# Altium PCB Aux_Lights_Daughter_REV3.PcbDoc
Units mil, origin at the board's own origin, x right, y up, seen from the top; angles counter-clockwise.
Board outline 3300 x 3200 mil, 2 copper layers (Top Layer, Bottom Layer); 49 components, 38 nets, 226 pads, 24 vias.
Unrouted connection lines stored in the file: 51.
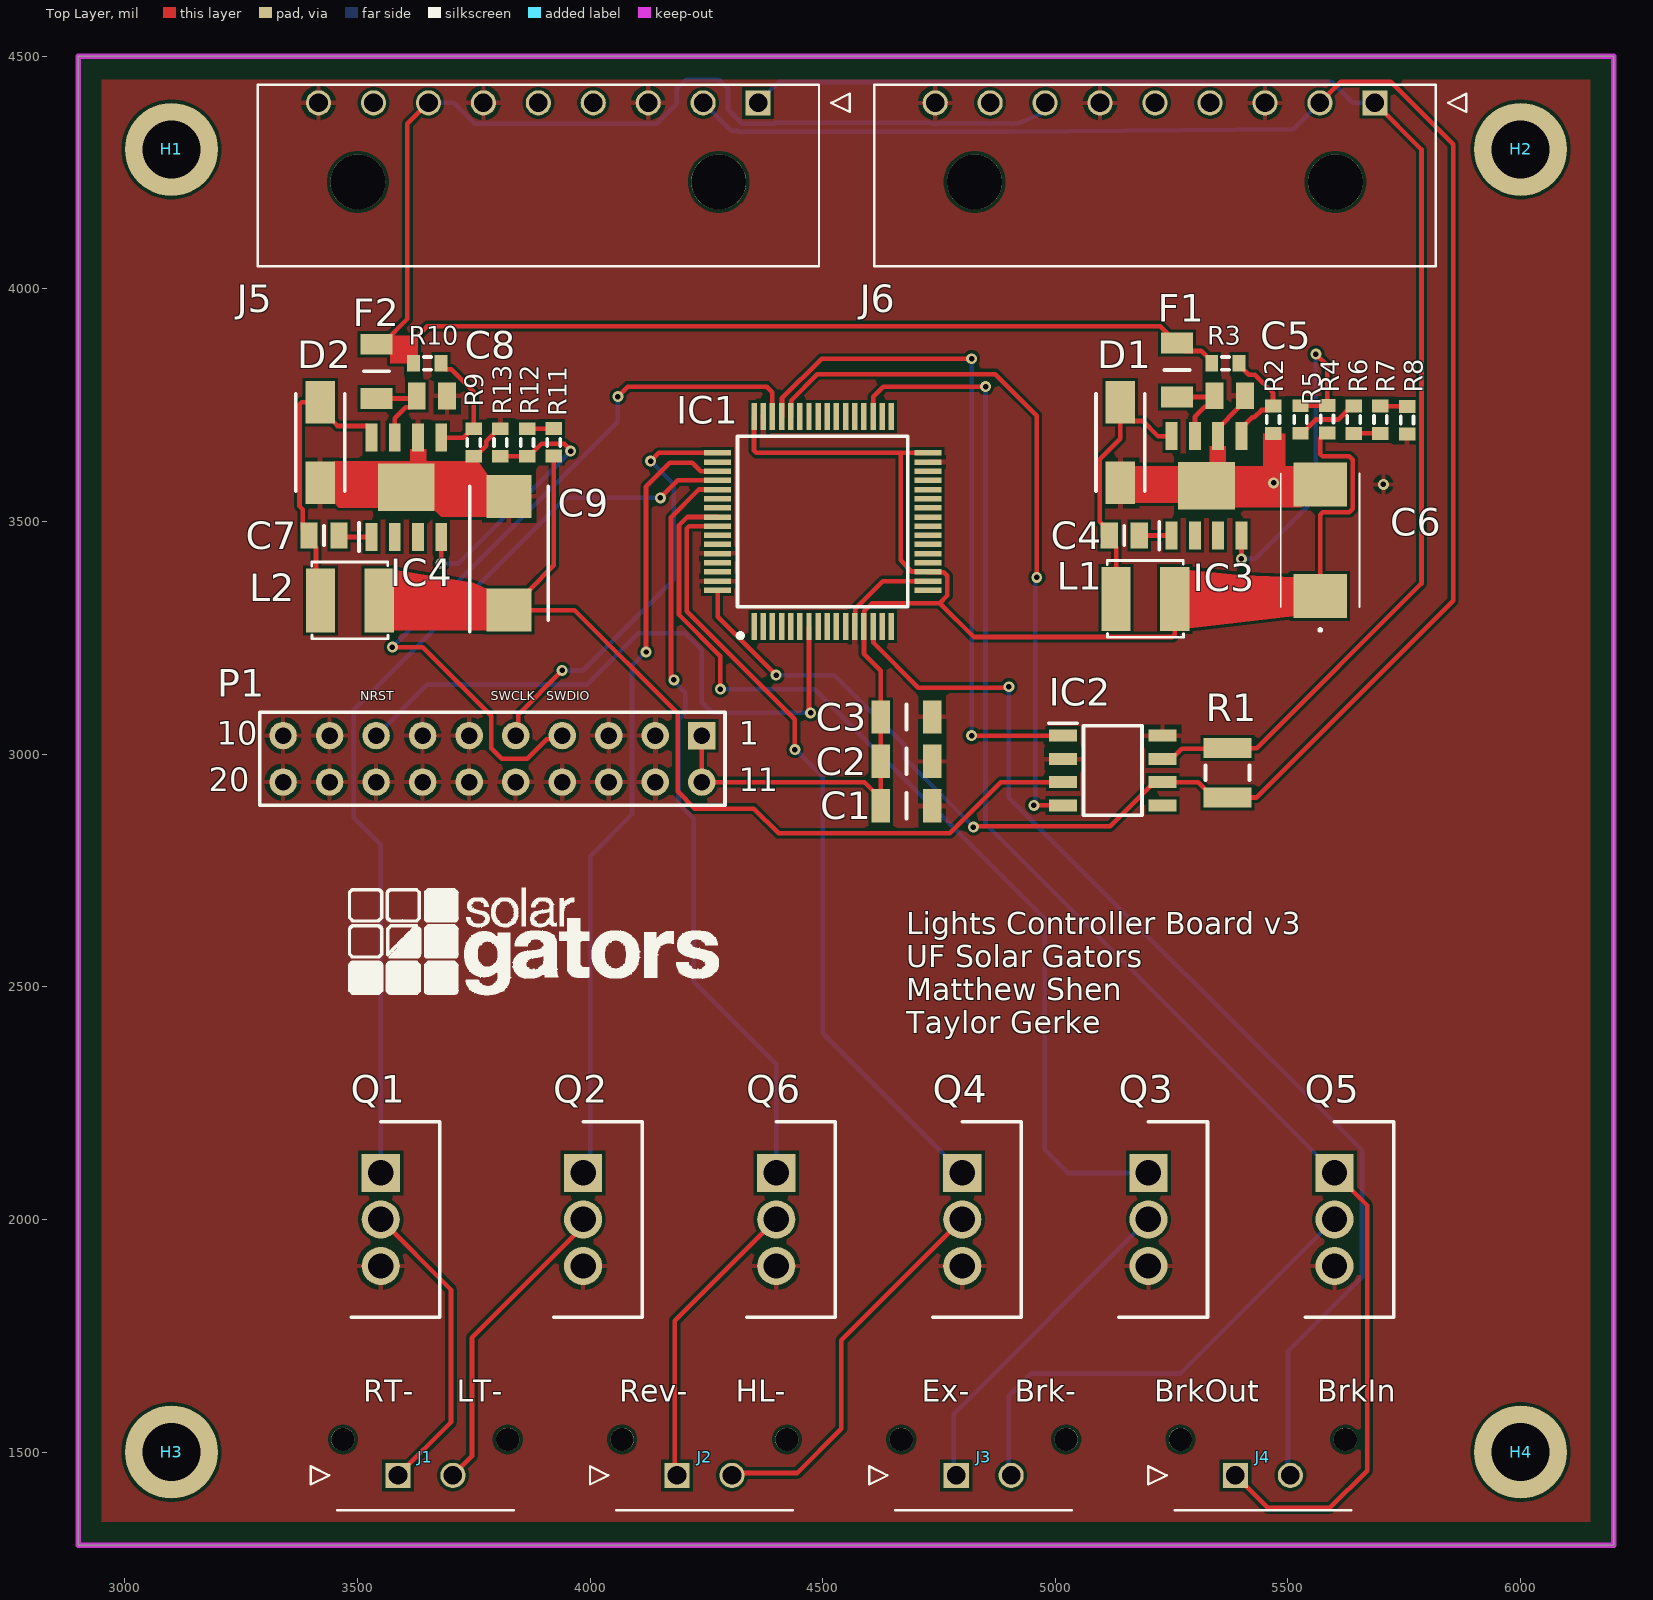
[diagram p0: Top Layer view]
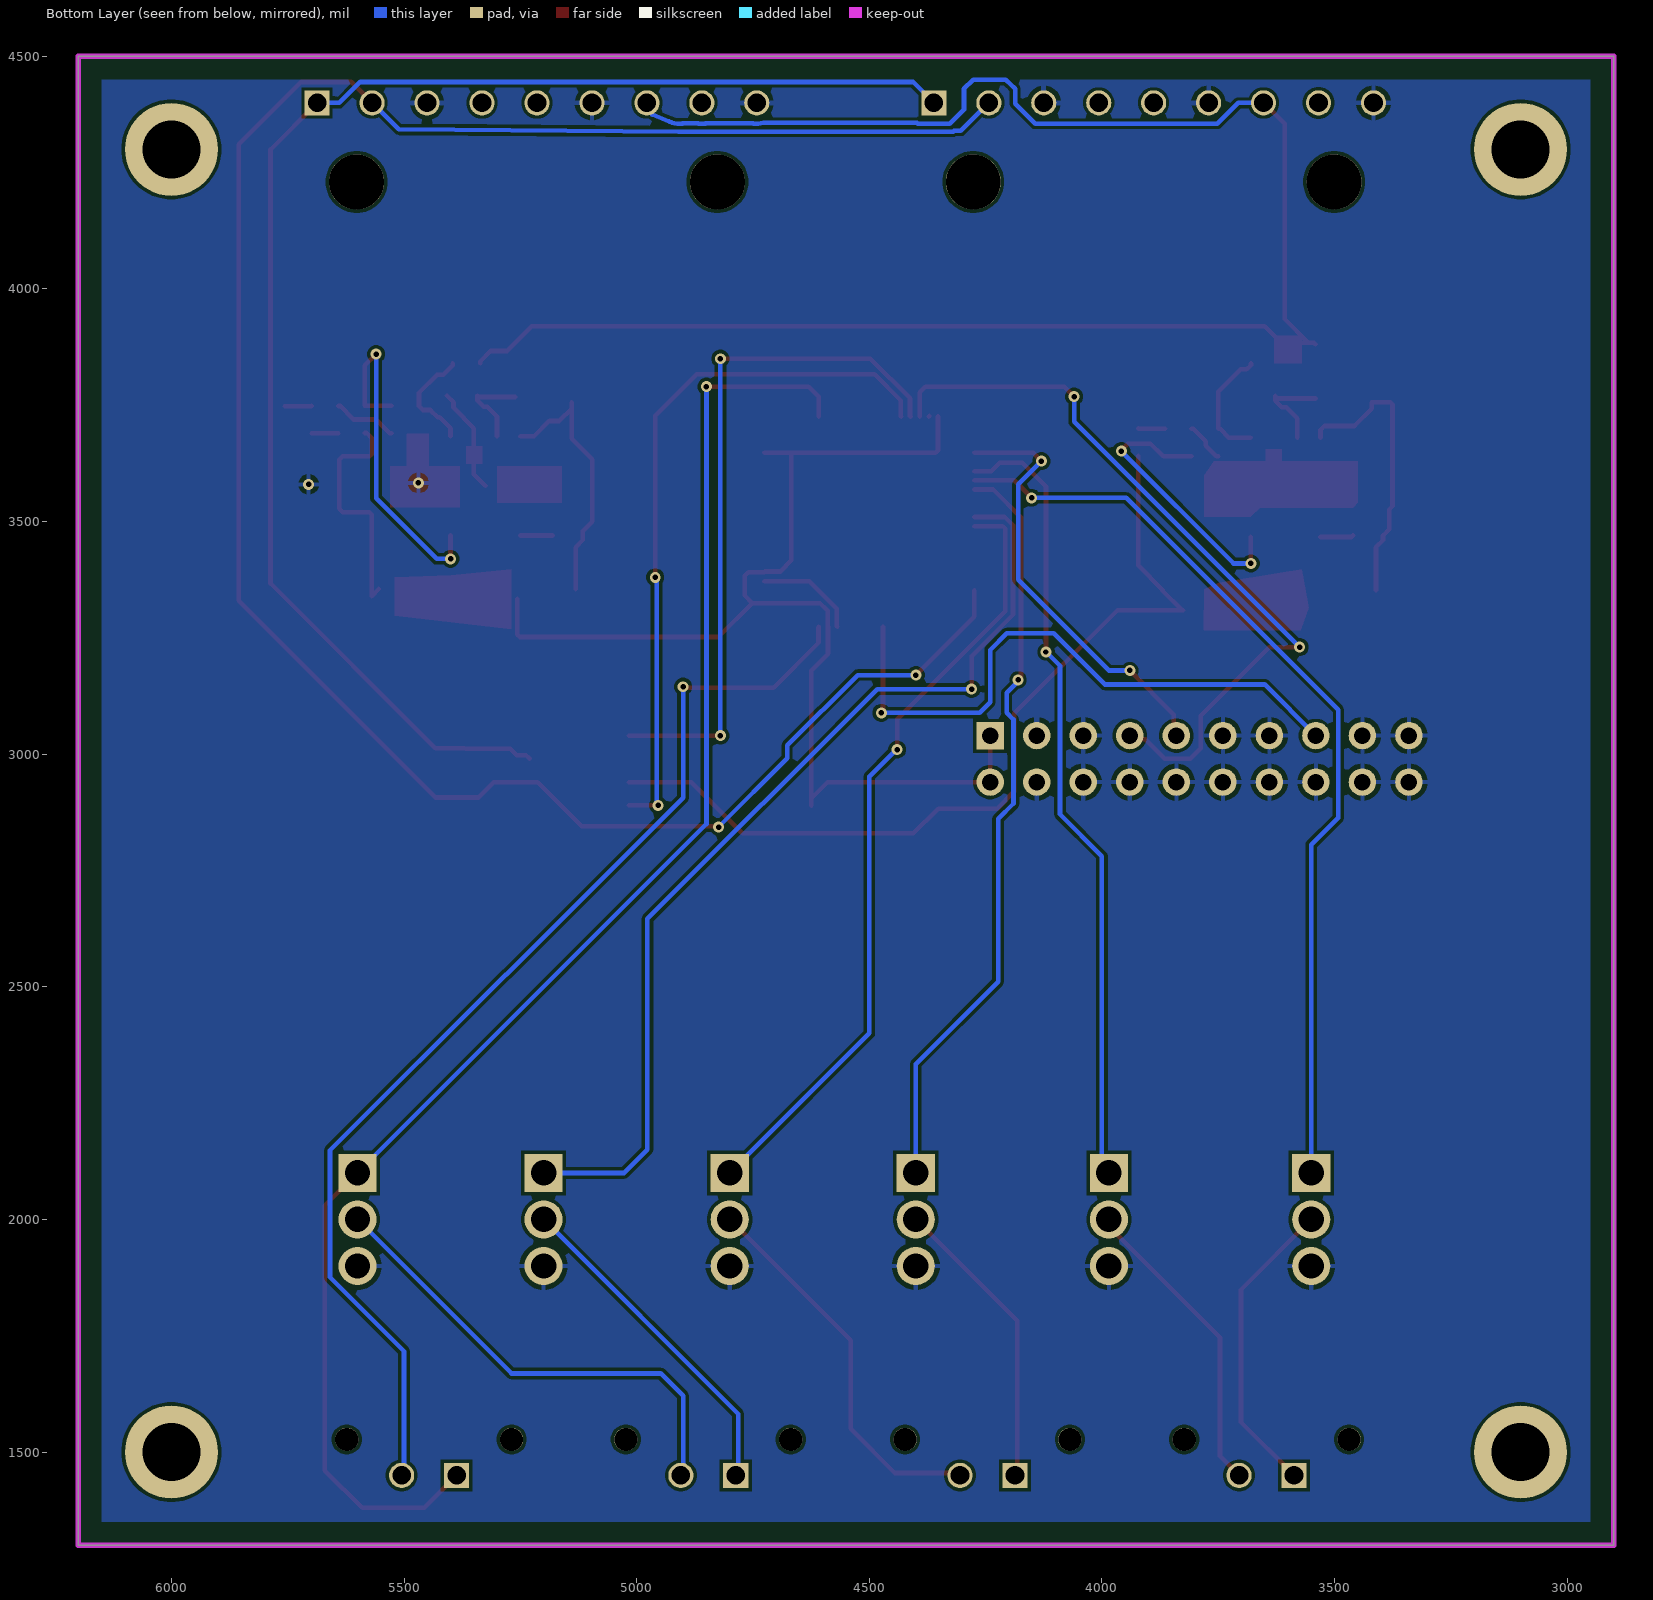
[diagram p1: Bottom Layer view, seen from below]
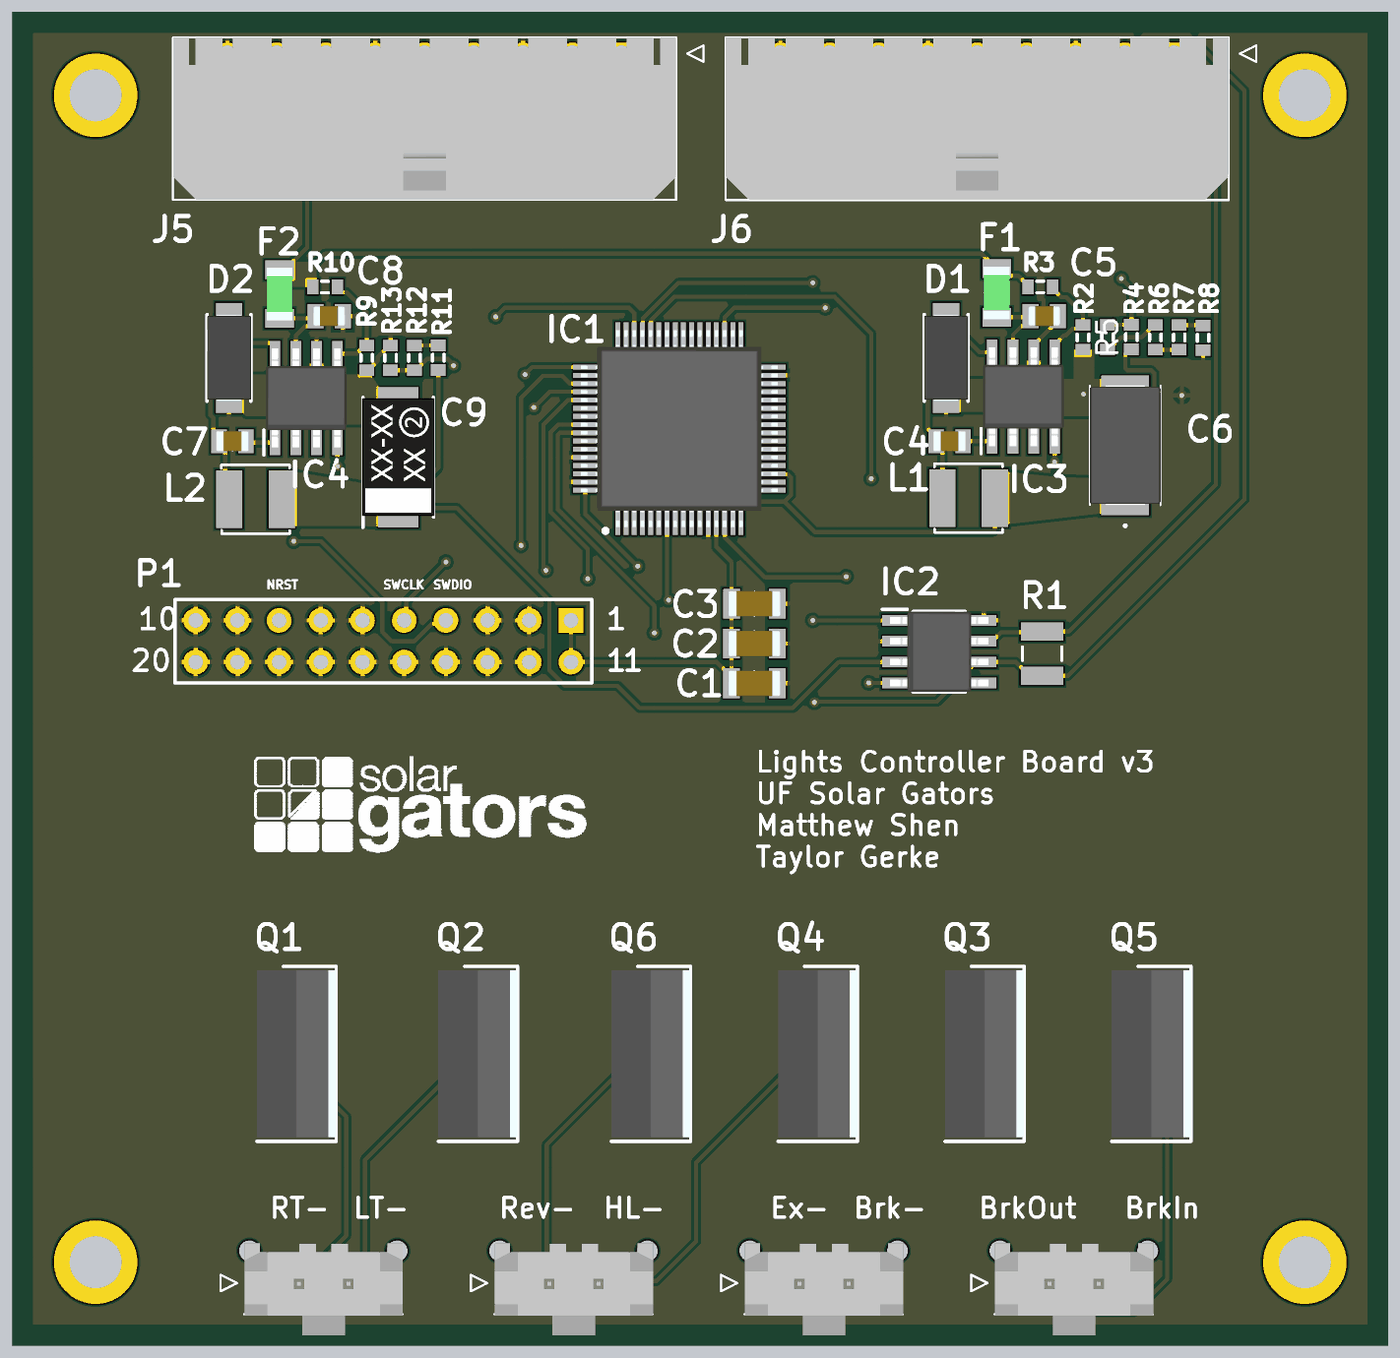
[diagram p2: 3D render of the assembled board from above, using the file's embedded part models]

## Layer stack, top to bottom
Top Solder: solder mask 0.4, Solder Resist, Dk 3.5
Top Layer: signal copper 1.4
Dielectric 1: dielectric 12.6, FR-4, Dk 4.8
Bottom Layer: signal copper 1.4
Bottom Solder: solder mask 0.4, Solder Resist, Dk 3.5

## Board outline
2900,1300 6200,1300 6200,4500 2900,4500

## Design rules (kind name [scope] priority, off if disabled: settings)
Clearance "Same Net Clearance" [All] p1: gap=7 ignorepadtopadclearanceinfootprint=FALSE except(0: Arc-Hole Track-Hole SMDPad-Hole THPad-Hole Via-Hole Fill-Hole Poly-Hole Region-Hole Text-Hole; 5: SMDPad-SMDPad; 7.87: Arc-SMDPad Track-SMDPad; 10: Arc-THPad Arc-Via Track-THPad Track-Via Via-Via; 19.68: THPad-THPad)
Clearance "Different Net Clearance" [All] p2: gap=7 ignorepadtopadclearanceinfootprint=FALSE except(0: Arc-Hole Track-Hole SMDPad-Hole THPad-Hole Via-Hole Fill-Hole Poly-Hole Region-Hole Text-Hole; 5: SMDPad-SMDPad; 7.87: Arc-SMDPad Track-SMDPad; 10: Arc-Via Track-Via Via-Via; 12.99: Arc-THPad Track-THPad; 15: THPad-THPad)
HoleSize [All] p1: absolutevalues=TRUE maxlimit=248.03 minlimit=7.87 maxpercent=80.000 minpercent=20.000
HoleToHoleClearance [All] p1: gap=19.68 allowstackedmicrovias=TRUE
MinimumSolderMaskSliver [All] p1: minsoldermaskwidth=8
PolygonConnect [All] p1: connectstyle=Relief reliefconductorwidth=10 reliefentries=4 polygonreliefangle="90 Angle" airgapwidth=10
RoutingVias [All] p1: holewidth=7.87 width=15.75 viastyle="Through Hole" minholewidth=7.87 minwidth=15.75 maxholewidth=28 maxwidth=50
SilkToSolderMaskClearance [IsPad] p1: minsilkscreentomaskgap=1.97 clearancetoexposedcopper=TRUE
SolderMaskExpansion [All] p1: expansion=4 istentingtop=FALSE
Width [All] p1: maxlimit=10 minlimit=5 preferedwidth=10
26 further rules are at their usual default settings.

## Classes and differential pairs
component class Aux_Lights_Power_Conversion: C4 C5 C6 C7 C8 C9 D1 D2 F1 F2 IC3 IC4 L1 L2 R2 R3 R4 R5 R6 R7 R8 R9 R10 R11 R12 R13
component class Aux_Lights_Daughter_REV3: C1 C2 C3 H1 H2 H3 H4 IC1 IC2 J1 J2 J3 J4 J5 J6 P1 Q1 Q2 Q3 Q4 Q5 Q6 R1

## Components (designator, comment, footprint, x,y, rotation, side; value= is the part's Value field where it differs from the comment)
C1 "C1206C104K5RAC7867" CAPC3216X110N 4680,2889.11 r0 top
C2 "C1206C104K5RAC7867" CAPC3216X110N 4680,2984.56 r0 top
C3 "C1206C104K5RAC7867" CAPC3216X110N 4680.12,3080 r0 top
C4 "CL21B103KBANNNC" CAPC2012X65N 5148.06,3470 r0 top value=10nF
C5 "CL21A106KAYNNNE" CAPC2012X145N 5374.97,3770.44 r0 top value="10 uF"
C6 "4TPE330M" POSCAP_D12_D15_D15E_D2E_D2_D3L_D4 5569.26,3460 r90 top value=330uF
C7 "CL21B103KBANNNC" CAPC2012X65N 3428.06,3470 r0 top value=10nF
C8 "CL21A106KAYNNNE" CAPC2012X145N 3660,3770 r0 top value="10 uF"
C9 "293D227X9010D2TE3" CAPPM7343X310N 3825.64,3431.64 r90 top value=220uF
D1 "SS14" DIONM5327X242N 5139.79,3670 r270 top
D2 "SS14" DIONM5327X242N 3419.79,3670 r270 top
F1 "0437.250WR" FUSC3216X86N 5261.02,3825.95 r90 top value=250mA
F2 "0437.250WR" FUSC3216X86N 3541.02,3822.87 r90 top value=250mA
H1 "Hole 125mil" Hole 3100,4300 r0 top
H2 "Hole 125mil" Hole 6000,4300 r0 top
H3 "Hole 125mil" Hole 3100,1500 r0 top
H4 "Hole 125mil" Hole 6000,1500 r0 top
IC1 "STM32F072RBT6" QFP50P1200X1200X160-64N 4500,3500 r90 top
IC2 "SN65HVDA1040BQDRQ1" SOIC127P600X175-8N 5123.27,2965 r0 top
IC3 "TPS5430MDDAREP" SOIC127P600X170-9N 5325,3576.77 r90 top
IC4 "TPS5430MDDAREP" SOIC127P600X170-9N 3605,3573.69 r90 top
J1 "43650-0215" 43650-02YY_15,16,17 3586.89,1450 r180 top
J2 "43650-0215" 43650-02YY_15,16,17 4186.89,1450 r180 top
J3 "43650-0215" 43650-02YY_15,16,17 4786.89,1450 r180 top
J4 "43650-0215" 43650-02YY_15,16,17 5386.89,1450 r180 top
J5 "43650-0900" 43650-09YY_R 4361.14,4400.08 r0 top
J6 "43650-0900" 43650-09YY_R 5686.64,4400 r0 top
L1 "SWPA4030S100MT" SWPA4030S100MT 5199,3338.19 r0 top value=22uH
L2 "SWPA4030S100MT" SWPA4030S100MT 3489,3335.11 r0 top value=22uH
P1 "Header 10X2A" HDR2X10_CEN 4240,3040 r180 top
Q1 "FQP13N06L" TO254P483X1016X2261-3P 3550,2100 r270 top
Q2 "FQP13N06L" TO254P483X1016X2261-3P 3985,2100 r270 top
Q3 "FQP13N06L" TO254P483X1016X2261-3P 5200,2100 r270 top
Q4 "FQP13N06L" TO254P483X1016X2261-3P 4800,2100 r270 top
Q5 "FQP13N06L" TO254P483X1016X2261-3P 5600,2100 r270 top
Q6 "FQP13N06L" TO254P483X1016X2261-3P 4400,2100 r270 top
R1 "SG73P2ETTD1200F" 14-1210 5370,2960 r90 top value=1K
R2 "0603WAF6802T5E" J1-0603 5467.88,3719.03 r90 top value=1K
R3 "0603WAF100KT5E" J1-0603 5365.52,3840.1 r180 top value=1K
R4 "0603WAF1302T5E" J1-0603 5584.16,3720 r90 top value=13K
R5 "0603WAF2201T5E" J1-0603 5526.9,3719.53 r270 top value=2.2K
R6 "0603WAF2201T5E" J1-0603 5641.41,3719.03 r270 top value=2.2K
R7 "0603WAF2201T5E" J1-0603 5698.67,3719.03 r90 top value=2.2K
R8 "0603WAF1001T5E" J1-0603 5755.92,3718.05 r270 top value=1K
R9 "0603WAF6802T5E" J1-0603 3750,3670 r90 top value=1K
R10 "0603WAF100KT5E" J1-0603 3650,3840 r180 top value=1K
R11 "0603WAF1002T5E" J1-0603 3921.76,3670.47 r90 top value=10K
R12 "0603WAF2000T5E" J1-0603 3864.51,3670 r270 top value=0.2k
R13 "0603WAF3301T5E" J1-0603 3807.26,3670 r90 top value=3.3K

## Footprints (in the part's own frame and the unit in brackets; to place one, negate y for a bottom-side part, rotate by r counter-clockwise, add the part's x,y. Pads: shape width x height; smd on the part's side, far side on the other; paste and mask are expansions set on the pad)
14-1210 [mm] "Chip Resistor, Body 3.2x2.5mm, IPC High Density"
  rect 1.1x2.6 smd: 1(-1.35,0) 2(1.35,0)
  silkscreen extent -0.4,-1.2 0.4,1.2, body extent -1.68,-1.32 1.68,1.32, height 0.9
43650-02YY_15,16,17 [mm]
  rect 1.37x1.37 hole 1.02: 1(0,0)
  round 1.37 hole 1.02: 2(-3,0)
  round 1.27 hole 1.27 unplated: 3(3,-1.96) 4(-6,-1.96)
  silkscreen extent -6.32,-0.5 4.75,1.9, body extent -6.35,-2.42 3.3,3.18, height 9.81
43650-09YY_R [mm]
  rect 1.37x1.37 hole 1.02: 1(0,0)
  round 1.37 hole 1.02: 2(-3,0) 3(-6,0) 4(-9,0) 5(-12,0) 6(-15,0) 7(-18,0) 8(-21,0) 9(-24,0)
  round 3 hole 3 unplated: 10(-2.15,-4.32) 11(-21.85,-4.32)
  silkscreen extent -27.33,-8.92 5,0.98, body extent -27.31,-8.9 3.32,1, height 5.54
CAPC2012X65N [mm]
  rect 0.94x1.43 smd: 1(-0.82,0) 2(0.82,0)
  silkscreen extent 0,-0.53 0,0.53, body extent -1,-0.63 1,0.63, height 0.65
CAPC2012X145N [mm]
  rect 0.97x1.47 smd: 1(-0.83,0) 2(0.83,0)
  body extent -1,-0.63 1,0.63, height 1.45
CAPC3216X110N [mm]
  rect 1.02x1.82 smd: 1(-1.4,0) 2(1.4,0)
  silkscreen extent 0,-0.7 0,0.7, body extent -1.6,-0.8 1.6,0.8, height 1.1
CAPPM7343X310N [mm]
  rect 2.35x2.45 smd: 1(-3.1,0) 2(3.1,0)
  silkscreen extent -4.28,-2.15 3.65,2.15, body extent -3.59,-2.21 3.6,2.21, height 2.92
DIONM5327X242N [mm]
  rect 2.3x1.6 smd: 1(-2.2,0) 2(2.2,0)
  silkscreen extent -2.65,-1.33 2.65,1.34, body extent -2.65,-1.34 2.65,1.34, height 2.42
FUSC3216X86N [mm]
  rect 1.14x1.75 smd: 1(-1.48,0) 2(1.48,0)
  silkscreen extent 0,-0.69 0,0.69, body extent -1.6,-0.79 1.6,0.79, height 0.86
HDR2X10_CEN [mm] "Connector; Header; 10x2 Position"
  rect 1.5x1.5 hole 0.9: 1(0,0)
  round 1.5 hole 0.9: 2(2.54,0) 3(5.08,0) 4(7.62,0) 5(10.16,0) 6(12.7,0) 7(15.24,0) 8(17.78,0) 9(20.32,0) 10(22.86,0) 11(0,2.54) 12(2.54,2.54) 13(5.08,2.54) 14(7.62,2.54) 15(10.16,2.54) 16(12.7,2.54) 17(15.24,2.54) 18(17.78,2.54) 19(20.32,2.54) 20(22.86,2.54)
  silkscreen extent -1.27,-1.27 24.13,3.81
Hole [mil]
  round 200 hole 125: 2(0,0)
J1-0603 [mm] "Chip Resistor, Body 1.6x0.8mm, IPC High Density"
  rect 0.7x0.9 smd: 1(-0.75,0) 2(0.75,0)
  silkscreen extent -0.2,-0.35 0.2,0.35, body extent -0.85,-0.48 0.85,0.48, height 0.9
POSCAP_D12_D15_D15E_D2E_D2_D3L_D4 [mm]
  rect 2.4x2.9 smd: 1(-3.05,0) 2(3.05,0)
  silkscreen extent -4.95,-2.15 3.65,2.15, body extent 0,0 0,0, height 1.02
QFP50P1200X1200X160-64N [mm]
  rect 1.475x0.3 smd: 1(-5.738,3.75) 2(-5.738,3.25) 3(-5.738,2.75) 4(-5.738,2.25) 5(-5.738,1.75) 6(-5.738,1.25) 7(-5.738,0.75) 8(-5.738,0.25) 9(-5.738,-0.25) 10(-5.738,-0.75) 11(-5.738,-1.25) 12(-5.738,-1.75) 13(-5.738,-2.25) 14(-5.738,-2.75) 15(-5.738,-3.25) 16(-5.738,-3.75) 33(5.738,-3.75) 34(5.738,-3.25) 35(5.738,-2.75) 36(5.738,-2.25) 37(5.738,-1.75) 38(5.738,-1.25) 39(5.738,-0.75) 40(5.738,-0.25) 41(5.738,0.25) 42(5.738,0.75) 43(5.738,1.25) 44(5.738,1.75) 45(5.738,2.25) 46(5.738,2.75) 47(5.738,3.25) 48(5.738,3.75)
  rect 0.3x1.475 smd: 17(-3.75,-5.738) 18(-3.25,-5.738) 19(-2.75,-5.738) 20(-2.25,-5.738) 21(-1.75,-5.738) 22(-1.25,-5.738) 23(-0.75,-5.738) 24(-0.25,-5.738) 25(0.25,-5.738) 26(0.75,-5.738) 27(1.25,-5.738) 28(1.75,-5.738) 29(2.25,-5.738) 30(2.75,-5.738) 31(3.25,-5.738) 32(3.75,-5.738) 49(3.75,5.738) 50(3.25,5.738) 51(2.75,5.738) 52(2.25,5.738) 53(1.75,5.738) 54(1.25,5.738) 55(0.75,5.738) 56(0.25,5.738) 57(-0.25,5.738) 58(-0.75,5.738) 59(-1.25,5.738) 60(-1.75,5.738) 61(-2.25,5.738) 62(-2.75,5.738) 63(-3.25,5.738) 64(-3.75,5.738)
  silkscreen extent -6.35,-4.65 4.65,4.65, body extent -6,-6 6,6, height 1.6
SOIC127P600X170-9N [mm]
  rect 1.525x0.65 smd: 1(-2.712,1.905) 2(-2.712,0.635) 3(-2.712,-0.635) 4(-2.712,-1.905) 5(2.712,-1.905) 6(2.712,-0.635) 7(2.712,0.635) 8(2.712,1.905)
  rect 2.6x3.1 smd: 9(0,0)
  silkscreen extent -3.47,2.58 -1.95,2.58, body extent -3.01,-2.45 3.01,2.45, height 1.57
SOIC127P600X175-8N [mm]
  rect 1.528x0.65 smd: 1(-2.711,1.905) 2(-2.711,0.635) 3(-2.711,-0.635) 4(-2.711,-1.905) 5(2.711,-1.905) 6(2.711,-0.635) 7(2.711,0.635) 8(2.711,1.905)
  silkscreen extent -3.47,-2.45 1.6,2.58, body extent -3.01,-2.45 3.01,2.45, height 1.63
SWPA4030S100MT [mm]
  rect 1.6x3.5 smd: 1(-1.74,-0.115) 2(1.46,-0.115)
  silkscreen extent -2.22,-2.21 1.94,1.98
TO254P483X1016X2261-3P [mm]
  rect 2.085x2.085 hole 1.39: 1(0,0)
  round 2.085 hole 1.39: 2(2.54,0) 3(5.08,0)
  silkscreen extent -2.8,-1.61 7.88,3.22, body extent -2.54,-1.61 7.62,3.22, height 21.59

## Part data
C1 C2 C3: "Capacitor", Manufacturer_Name=Kemet, Mouser2 Part Number=80-C1206104K5RAC7867, Datasheet Link=https://componentsearchengine.com//C1206C104K5RAC7867.pdf, Height=1.1mm, Manufacturer_Part_Number=C1206C104K5RAC7867, Mouser2 Price/Stock=https://www.mouser.com/Search/Refine.aspx?Keyword=80-C1206104K5RAC7867
C4 C5 C7 C8: "Capacitor", Manufacturer_Name="Samsung Electro-Mechanics"
  C4 C7: Datasheet Link=https://datasheet.datasheetarchive.com/originals/distributors/Datasheets_SAMA/97c54fb7f716f6f5bd35dfc2c9b17795.pdf, Height=0.65mm, Manufacturer_Part_Number=CL21B103KBANNNC
  C5 C8: Datasheet Link=https://datasheet.datasheetarchive.com/originals/distributors/Datasheets_SAMA/6a45835c9b7400e9b49c55c38a8ff4a2.pdf, Height=1.45mm, Manufacturer_Part_Number=CL21A106KAYNNNE
C6: "Capacitor Polarised", Manufacturer_Name=Panasonic, Datasheet Link=http://industrial.panasonic.com/cdbs/www-data/pdf/AAA8000/AAA8000C36.pdf, Manufacturer_Part_Number=4TPE330M
C9: "Capacitor Polarised", Manufacturer_Name=Vishay, Datasheet Link=http://www.vishay.com/doc?40002, Height=3.1mm, Manufacturer_Part_Number=293D227X9010D2TE3
D1 D2: "Schottky Diode", Manufacturer_Name="MDD(Microdiode Electronics)", Datasheet Link=https://datasheet.lcsc.com/szlcsc/1903051003_MDD-Jiangsu-Yutai-Elec-SS14_C2480.pdf, Height=2.42mm, Manufacturer_Part_Number=SS14
F1 F2: "Fuse", Manufacturer_Name=LITTELFUSE, Datasheet Link=https://m.littelfuse.com/~/media/electronics/datasheets/fuses/littelfuse_fuse_437_datasheet.pdf.pdf, Height=0.864mm, Manufacturer_Part_Number=0437.250WR
IC1: "Integrated Circuit", Manufacturer_Name=STMicroelectronics, Mouser2 Part Number=511-STM32F072RBT6, Datasheet Link=https://componentsearchengine.com//STM32F072RBT6.pdf, Height=1.6mm, Manufacturer_Part_Number=STM32F072RBT6, Mouser2 Price/Stock=https://www.mouser.com/Search/Refine.aspx?Keyword=511-STM32F072RBT6
IC2: "Integrated Circuit", Manufacturer_Name="Texas Instruments", Datasheet Link=http://www.ti.com/lit/gpn/SN65HVDA1040B-Q1, Height=1.75mm, Manufacturer_Part_Number=SN65HVDA1040BQDRQ1
IC3 IC4: "Integrated Circuit", Manufacturer_Name="Texas Instruments", Mouser2 Part Number=595-TPS5430MDDAREP, Datasheet Link=http://www.ti.com/lit/gpn/tps5430-ep, Height=1.7mm, Manufacturer_Part_Number=TPS5430MDDAREP, Mouser2 Price/Stock=https://www.mouser.com/Search/Refine.aspx?Keyword=595-TPS5430MDDAREP
J1 J2 J3 J4: "Connector", Manufacturer_Name=Molex, Mouser2 Part Number=538-43650-0215, Datasheet Link=https://componentsearchengine.com//43650-0215.pdf, Height=9.9mm, Manufacturer_Part_Number=43650-0215, Mouser2 Price/Stock=https://www.mouser.com/Search/Refine.aspx?Keyword=538-43650-0215
J5 J6: "Connector", Manufacturer_Name=Molex, Datasheet Link=https://www.molex.com/pdm_docs/sd/436500200_sd.pdf, Height=5.57mm, Manufacturer_Part_Number=43650-0900
P1: "Header, 10-Pin, Dual row", LatestRevisionDate=17-Jul-2002, LatestRevisionNote="Re-released for DXP Platform.", Publisher="Altium Limited"
Q1 Q2 Q3 Q4 Q5 Q6: "MOSFET (N-Channel)", Manufacturer_Name="ON Semiconductor", Mouser2 Part Number=512-FQP13N06L, Datasheet Link=https://componentsearchengine.com//FQP13N06L.pdf, Height=4.83mm, Manufacturer_Part_Number=FQP13N06L, Mouser2 Price/Stock=https://www.mouser.com/Search/Refine.aspx?Keyword=512-FQP13N06L
R1 R2 R3 R4 R5 R6 R7 R8 R9 R10 R11 R12 R13: library part Res3, "Resistor", LatestRevisionDate=29-May-2009, LatestRevisionNote="IPC-7351 Footprint Added.", PackageDescription="Chip Resistor", PackageReference=J1-0603, Published=8-Jun-2000, Publisher="Altium Limited"

## Via types
v1: diameter 23.62, hole 11.81, Top Layer to Bottom Layer, tented both sides, 24 vias

## Nets (pads, with @x,y where several pads share a name; then routed paths per layer and width w, separated by ;. In a path a pad name is that pad's centre, name@x,y a point inside that pad or via, vN(x,y) a via of type N, cw(c..) or ccw(c..) an arc to the next point about the centre after c; other vN are vias at no path point)
3V3: C1.1 C2.1 C3.1 C6.1 IC1.13 IC1.19 IC1.32 IC1.48 L1.2 P1.1 P1.11 R4.1 | length 3083.2
  Top Layer w10: P1.1 P1.11 4589.74,2940 C1.1@4624.88,2904.86 ; IC1.48 4352.36,3652.62 4357.34,3647.64 IC1.32 ; C1.1 C1.1@4624.88,2904.86 ; 4670.28,3647.64 4667.64,3645 4667.64,3416.54 4691.54,3392.64 4725,3392.64 IC1.19 4726.81,3390.83 4760.27,3390.83 4767.82,3383.28 4767.82,3341.12 4751.48,3324.79 ; L1.2 5256.48,3256.88 5251.5,3251.9 4824.38,3251.9 4751.48,3324.79 ; C6.1@5554.04,3355.15 C6.1 5569.26,3514.98 5574.24,3519.96 5631.68,3519.96 5639.22,3527.5 5639.22,3632.65 5631.68,3640.2 5574.24,3640.2 5569.26,3645.18 5569.26,3679.51 5580.22,3690.47 R4.1 ; C1.1@4624.88,2904.86 C2.1 4624.88,3000 4625,3000.12 C3.1 4625,3179.26 4588.58,3215.68 IC1.13 4589.49,3275 4589.49,3308.46 4605.82,3324.79 4751.48,3324.79
5V5: C9.1 IC2.3 L2.2 R11.1 | length 1903.9
  Top Layer w10: C9.1 C9.1@3827.61,3309.6 ; R11.1 3921.77,3405.72 3868.87,3352.82 3868.87,3350.86 C9.1@3827.61,3309.6 ; IC2.3 4882.58,2940 4772.58,2830 4405,2830 4352,2883 4225,2883 4188,2920 4188,3088 3966.4,3309.6 C9.1@3827.61,3309.6
12VM: F1.2 F2.2 J5.7 J6.7 R3.2 R10.2 | length 3890.9
  Top Layer w10: F2.2 3544.1,3884.22 F2.2@3556.11,3884.22 ; J5.7 3607.27,4354.87 3607.27,3935.38 F2.2@3556.11,3884.22 ; R3.2 5336,3844.04 5313.25,3866.78 5278.47,3866.78 F1.2 5225.25,3920 3650,3920 3614.22,3884.22 F2.2@3556.11,3884.22
  Bottom Layer w10: J5.7 3707,4400.08 3751.96,4355.12 4143.54,4355.12 4186.49,4398.07 4186.49,4430.04 4196.45,4440 ; 4196.49,4440 4206.49,4450 4276.49,4450 4296.49,4430 4296.49,4388.86 4296.49,4385.34 4326.72,4355.12 4395.56,4355.12 4397.44,4357 4727.41,4357 4733.14,4355.87 ccw(c4741.76,4400) 4749.67,4355.74 ccw(c4741.76,4400) 4750.38,4355.87 4850.46,4355.87 cw(c4850.46,4347.37) 4852.01,4355.73 ccw(c4859.87,4400) 4867.82,4355.75 cw(c4869.27,4347.37) 4869.27,4355.87 4899.79,4355.87 cw(c4899.79,4347.37) 4901.27,4355.74 ccw(c4909.36,4400.26) 4930,4360 4966.11,4374.86 4968.5,4377.26 4969.15,4378.81 J6.7
Brake-: J3.2 Q5.2 | length 1013
  Bottom Layer w10: J3.2@4900,1465 4900,1621 4948,1669 5269,1669 Q5.2
Brake_In: IC1.14 J4.2 | length 2422.4
  Top Layer w10: IC1.14 4609.17,3273.19 4609.17,3239.73 4705.71,3143.19 4898.19,3143.19 v1(4900,3145)
  Bottom Layer w10: v1(4900,3145) 4900,2906.08 5278.79,2527.29 5280.24,2527.29 5659.04,2148.5 5659.04,1875.55 5500,1716.51 J4.2@5500,1470
Brake_Out: IC1.35 J4.1 Q5.1 | length 3307.8
  Top Layer w10: IC1.35 4608.27,3768 4630.27,3790 v1(4850,3790) ; J4.1 5456.89,1380 5590,1380 5670,1460 5670,2030 Q5.1
  Bottom Layer w10: v1(4850,3790) 4850,2850 Q5.1
CANH: IC2.7 J5.1 J6.1 R1.2 | length 3150.5
  Top Layer w10: IC2.7 5237.8,2997.8 5257.8,2997.8 5271.8,3011.8 5368.65,3011.8 R1.2 5433.15,3013.15 5787,3367 5787,4299.64 J6.1
  Bottom Layer w10: J5.1 4406.06,4445 5594,4445 5639,4400 J6.1
CANL: IC1.64 IC2.6 J5.2 J6.2 R1.1 | length 4786.2
  Top Layer w10: IC1.64 4274.09,3295.91 v1(4400,3170) ; v1(4823.99,2843.5) 4825.49,2845 5117.72,2845 5212.72,2940 IC2.6 5307.32,2940 5340.47,2906.85 5431.85,2906.85 5855,3330 5855,4311.02 5721.06,4444.96 5613.49,4444.96 J6.2
  Bottom Layer w10: J5.2 4303.11,4340 4317.79,4340 4319.68,4338.12 4738.65,4338.12 ccw(c4741.76,4400) 4741.77,4338.04 4849.95,4337.9 4866.96,4337.9 4909.52,4338.02 ccw(c4909.36,4400.26) 4909.87,4338.02 5511.53,4343 J6.2 ; v1(4400,3170) 4525,3170 4676.2,3018.8 4676.2,2991.29 v1(4823.99,2843.5)
Extra-: J3.1 Q3.2 | length 713.2
  Bottom Layer w10: J3.1@4781.89,1460 4781.89,1581.89 Q3.2
Extra_Out: IC1.56 Q3.1 | length 2120.8
  Top Layer w10: IC1.56 4208.66,3509.84 4191,3492.18 4191,3299.96 4280,3210.96 v1(4280,3140)
  Bottom Layer w10: v1(4280,3140) 4483,3140 4977,2646 4977,2150 5027,2100 Q3.1
GND: C1.2 C2.2 C3.2 C5.2 C6.2 C8.2 C9.2 D1.2 D2.2 IC1.12 IC1.18 IC1.31 IC1.47 IC1.60 IC1.63 IC2.2 IC2.8 IC3.6 IC3.9 IC4.6 IC4.9 J5.3 J5.6 J5.9 J6.3 J6.6 J6.9 P1.2 P1.3 P1.6 P1.7 P1.9 P1.10 P1.12 P1.13 P1.14 P1.15 P1.16 P1.17 P1.18 P1.19 P1.20 Q1.3 Q2.3 Q3.3 Q4.3 Q5.3 Q6.3 R2.1 R8.2 R9.1 R13.2 | length 613.7
  Top Layer w10: IC4.9@3595.3,3583.39 IC4.9 ; IC4.9@3625,3553.69 IC4.9 ; IC4.9@3630,3598.69 IC4.9 ; R9.1 3753.94,3640.47 3776.67,3663.2 3776.67,3672.87 3803.32,3699.53 R13.2 ; IC1.47@4371.14,3726.81 IC1.47 ; IC1.12 4569.8,3275 4569.8,3312.82 4629.03,3372.05 IC1.18 ; IC3.9 5350,3601.77 IC3.6 5350,3700.77 5393.55,3744.32 5393.55,3756.35 C5.2
  other v1: 5705,3580 5469,3583
Headlights-: J2.2 Q4.2 | length 838.8
  Top Layer w10: J2.2@4298.26,1455 4445,1455 4540,1550 4540,1740 Q4.2
Headlights_Out: IC1.57 Q4.1 | length 1699.6
  Top Layer w10: IC1.57@4274.06,3490.12 4212.98,3490.12 4208,3485.14 4208,3307 4440,3075 v1(4440,3010)
  Bottom Layer w10: v1(4440,3010) 4442,3010 4500,2952 4500,2400 Q4.1
LT-: J1.2 Q2.2 | length 672.2
  Top Layer w10: J1.2 3746,1491 3746,1746 Q2.2@4000,2000
LT_Out: IC1.51 Q2.1 | length 1708.3
  Top Layer w10: v1(4120.31,3219.69) 4120,3220 4120,3575 4171.5,3626.5 4219.27,3626.5 4237.5,3608.27 IC1.51
  Bottom Layer w10: Q2.1@4000,2100 4000,2781 4090,2871 4090,3190 4119.69,3219.69 v1(4120.31,3219.69)
NetC4_1: C4.1 D1.1 IC3.8 L1.1 | length 569.3
  Top Layer w10: L1.1@5130.94,3355.15 5130.94,3445.19 5115.78,3460.35 C4.1 5115.78,3479.65 5095.42,3500 5095.42,3633.99 5139.79,3678.36 D1.1@5139.79,3742.83 ; D1.1 D1.1@5139.79,3742.83 ; IC3.8 5220.64,3683.54 5187.85,3716.34 5166.29,3716.34 D1.1@5139.79,3742.83
NetC4_2: C4.2 IC3.1 | length 69.7
  Top Layer w10: C4.2 IC3.1
NetC5_1: C5.1 F1.1 IC3.7 | length 191.1
  Top Layer w10: F1.1 5339.54,3767.69 C5.1 5342.29,3760.6 5328.2,3746.51 5320.94,3746.51 5300,3725.56 IC3.7
NetC7_1: C7.1 D2.1 IC4.8 L2.1 | length 620.6
  Top Layer w10: L2.1@3410.94,3352.07 3410.94,3445.19 3395.78,3460.35 C7.1 3382.27,3483.5 3382.27,3525.93 3375.42,3532.78 3375.42,3751.63 3380.4,3756.61 D2.1 3419.79,3742.83 3457.14,3705.48 3522.2,3705.48 3530,3697.69 IC4.8
NetC7_2: C7.2 IC4.1 | length 70.9
  Top Layer w10: C7.2 3463.43,3466.92 IC4.1
NetC8_1: C8.1 F2.1 IC4.7 | length 203.3
  Top Layer w10: F2.1 3621.93,3764.61 C8.1 3627.32,3760.16 3613.23,3746.06 3603.58,3746.06 3580,3722.48 IC4.7
NetIC3_4: IC3.4 R4.2 R5.1 | length 751.8
  Top Layer w10: v1(5400,3420) IC3.4 ; R5.1 5527.14,3749.29 5583.92,3749.29 R4.2 5584.16,3835.84 v1(5560,3860)
  Bottom Layer w10: v1(5400,3420) 5430,3420 5560,3550 v1(5560,3860)
NetIC3_5: IC3.5 R2.2 R3.1 | length 234.3
  Top Layer w10: R3.1 5395.05,3836.16 5415.85,3815.36 5428.97,3815.36 5467.88,3776.45 R2.2 5459.11,3739.77 5443.21,3739.77 5427.61,3724.17 5423.4,3724.17 5400,3700.77 IC3.5
NetIC4_4: IC4.4 R12.2 R13.1 | length 605.9
  Top Layer w10: v1(3680,3410) IC4.4 ; R13.1 R12.2 3868.45,3640.47 3895.57,3667.6 3944.82,3667.6 3958.29,3654.12 v1(3958.29,3651.21)
  Bottom Layer w10: v1(3680,3410) 3717.08,3410 v1(3958.29,3651.21)
NetIC4_5: IC4.5 R9.2 R10.1 | length 255.4
  Top Layer w10: R10.1 3679.53,3836.06 3688.31,3827.28 3701.63,3827.28 3750,3778.92 R9.2 3746.06,3699.53 3727,3680.46 IC4.5
NetR5_2: R5.2 R6.1 | length 138.8
  Top Layer w10: R5.2 5530.84,3690 5560.12,3719.28 5608.2,3719.28 5637.48,3748.55 R6.1
NetR6_2: R6.2 R7.1 | length 57.3
  Top Layer w10: R6.2 R7.1
NetR7_2: R7.2 R8.1 | length 57.7
  Top Layer w10: R7.2 5699.16,3748.07 5755.44,3748.07 R8.1
NetR11_2: R11.2 R12.1 | length 57.5
  Top Layer w10: R12.1 3864.75,3699.76 3921.53,3699.76 R11.2
NRST_pgm15: IC1.7 P1.8 | length 1348.2
  Top Layer w10: IC1.7 4470.47,3092.53 v1(4474,3089)
  Bottom Layer w10: P1.8 3650,3150 3994.04,3150 4103.74,3259.69 4204.3,3259.69 4240,3223.99 4240,3111.5 4262.5,3089 v1(4474,3089)
Rev-: J2.1 Q6.2 | length 625.3
  Top Layer w10: J2.1@4181.89,1465 4181.89,1781.89 Q6.2
Rev_Out: IC1.53 Q6.1 | length 1639.8
  Top Layer w10: v1(4180,3160) 4174,3166 4174,3509.38 4233.52,3568.9 IC1.53
  Bottom Layer w10: v1(4180,3160) 4180,3156.9 4204.61,3132.29 4204.61,3089.11 4190,3074.5 4190,2894 4223,2861 4223,2511 4400,2334 Q6.1
RT-: J1.1 Q1.2 | length 659.8
  Top Layer w10: Q1.2 3701,1849 3701,1564.11 J1.1
RT_Out: IC1.52 Q1.1 | length 2005.9
  Top Layer w10: v1(4151.04,3551.04) 4188.58,3588.58 IC1.52
  Bottom Layer w10: Q1.1 3550,2805 3492,2863 3492,3095.58 3947.47,3551.04 v1(4151.04,3551.04)
Rx: IC1.44 IC2.4 | length 1525.9
  Top Layer w10: IC1.44 4432.01,3726.81 4432.01,3760.27 4488.55,3816.81 4871.11,3816.81 4960,3727.92 v1(4960,3380) ; v1(4954,2890) IC2.4
  Bottom Layer w10: v1(4954,2890) 4957,2893 4957,3377 v1(4960,3380)
SWCLK_pgm9: IC1.49 P1.5 | length 929.3
  Top Layer w10: P1.5 3845.21,3045.21 3845.21,3085.21 v1(3940,3180) ; v1(4130,3630) 4147.64,3647.64 IC1.49
  Bottom Layer w10: v1(3940,3180) 3985,3180 4180,3375 4180,3580 v1(4130,3630)
SWDIO_pgm7: IC1.46 P1.4 | length 1663.8
  Top Layer w10: v1(3575,3230) 3640,3230 3787.52,3082.48 3787.52,3012.48 3810,2990 3864.44,2990 3906.36,3031.91 3931.91,3031.91 P1.4 ; v1(4059.46,3768.74) 4080.71,3790 4380,3790 4391.73,3778.27 IC1.46
  Bottom Layer w10: v1(3575,3230) 4059.46,3714.46 v1(4059.46,3768.74)
Tx: IC1.45 IC2.1 | length 1488.7
  Top Layer w10: IC1.45 4412.32,3726.81 4412.32,3764.63 4497.69,3850 v1(4820,3850) ; v1(4820,3040) IC2.1
  Bottom Layer w10: v1(4820,3040) v1(4820,3850)
pads on no net: H1.2 H2.2 H3.2 H4.2 IC1.1 IC1.2 IC1.3 IC1.4 IC1.5 IC1.6 IC1.8 IC1.9 IC1.10 IC1.11 IC1.15 IC1.16 IC1.17 IC1.20 IC1.21 IC1.22 IC1.23 IC1.24 IC1.25 IC1.26 IC1.27 IC1.28 IC1.29 IC1.30 IC1.33 IC1.34 IC1.36 IC1.37 IC1.38 IC1.39 IC1.40 IC1.41 IC1.42 IC1.43 IC1.50 IC1.54 IC1.55 IC1.58 IC1.59 IC1.61 IC1.62 IC2.5 IC3.2 IC3.3 IC4.2 IC4.3 J1.3 J1.4 J2.3 J2.4 J3.3 J3.4 J4.3 J4.4 J5.4 J5.5 J5.8 J5.10 J5.11 J6.4 J6.5 J6.8 J6.10 J6.11

## Polygon pours and split planes (outlines as drawn)
GND on Bottom Layer "GND Plane Top" (solid, pour order 1): 2950,4450 2950,1350 6150,1350 6150,4450
GND on Top Layer "GND Plane Top" (solid, pour order 0): 2950,4450 2950,1350 6150,1350 6150,4450

## Keep-outs
Keep-Out Layer:
  lines w11.81: 6100,1300 6200,1300 ; 6200,1300 6200,4500 6100,4500 2900,4500 2900,1300 6200,1300

## Other copper
Top Layer:
  rectangle net GND: 3613,3620 3648,3656
  rectangle net GND: 5331,3624 5367,3663
  rectangle net GND: 5446,3610 5495,3689.5
  rectangle net GND: 5380,3530 5530,3620
  rectangle net GND: 5160,3540 5300,3620
  rectangle net 12VM: 3570,3840 3630,3900
  region net 5V5: 3570,3398 3555,3315 3573,3266.2 3746,3266.2 3780,3265 3781.2,3266.2 3780,3355 3749,3368
  region net GND: 3450,3540 3460,3530 3660,3530 3680,3510 3780,3510 3780,3600 3760,3630 3560,3630 3540,3630 3450,3630
  region net 3V3: 5270,3398 5270,3268.75 5520,3297.75 5520,3350 5520,3380 5400,3385

## Silkscreen, mask and mechanical layers (free items; w line width, h text height)
Top Overlay:
  drawing of 2657 lines, arcs and shapes, not listed
  text "NRST" at 3506,3116 h20
  text "SWCLK" at 3786,3116 h20
  text "SWDIO" at 3906,3116 h20
  text "Lights Controller Board v3 / UF Solar Gators / Matthew Shen / Taylor Gerke" at 4680,2400 h47.24
  text "RT-" at 3512.87,1607.87 h47.24
  text "LT-" at 3712.87,1607.87 h47.24
  text "Rev-" at 4062.87,1607.87 h47.24
  text "HL-" at 4312.87,1607.87 h47.24
  text "Ex-" at 4712.87,1607.87 h47.24
  text "Brk-" at 4912.87,1607.87 h47.24
  text "BrkOut" at 5212.87,1607.87 h47.24
  text "BrkIn" at 5562.87,1607.87 h47.24

## Text inside footprints (layer, text, board x,y; h text height)
P1: Top Overlay "1" at 4320,3020 h50; Top Overlay "1" at 4360,2920 h50; Top Overlay "1" at 4320,2920 h50; Top Overlay "10" at 3197,3020 h50; Top Overlay "20" at 3180,2920 h50